# Altium PCB LP_LED_CUBE_8x8x8.PcbDoc
Units mil, origin at the board's own origin, x right, y up, seen from the top; angles counter-clockwise.
Board outline 4475 x 2925 mil, 2 copper layers (Top Layer, Bottom Layer); 153 components, 189 nets, 689 pads, 0 vias.
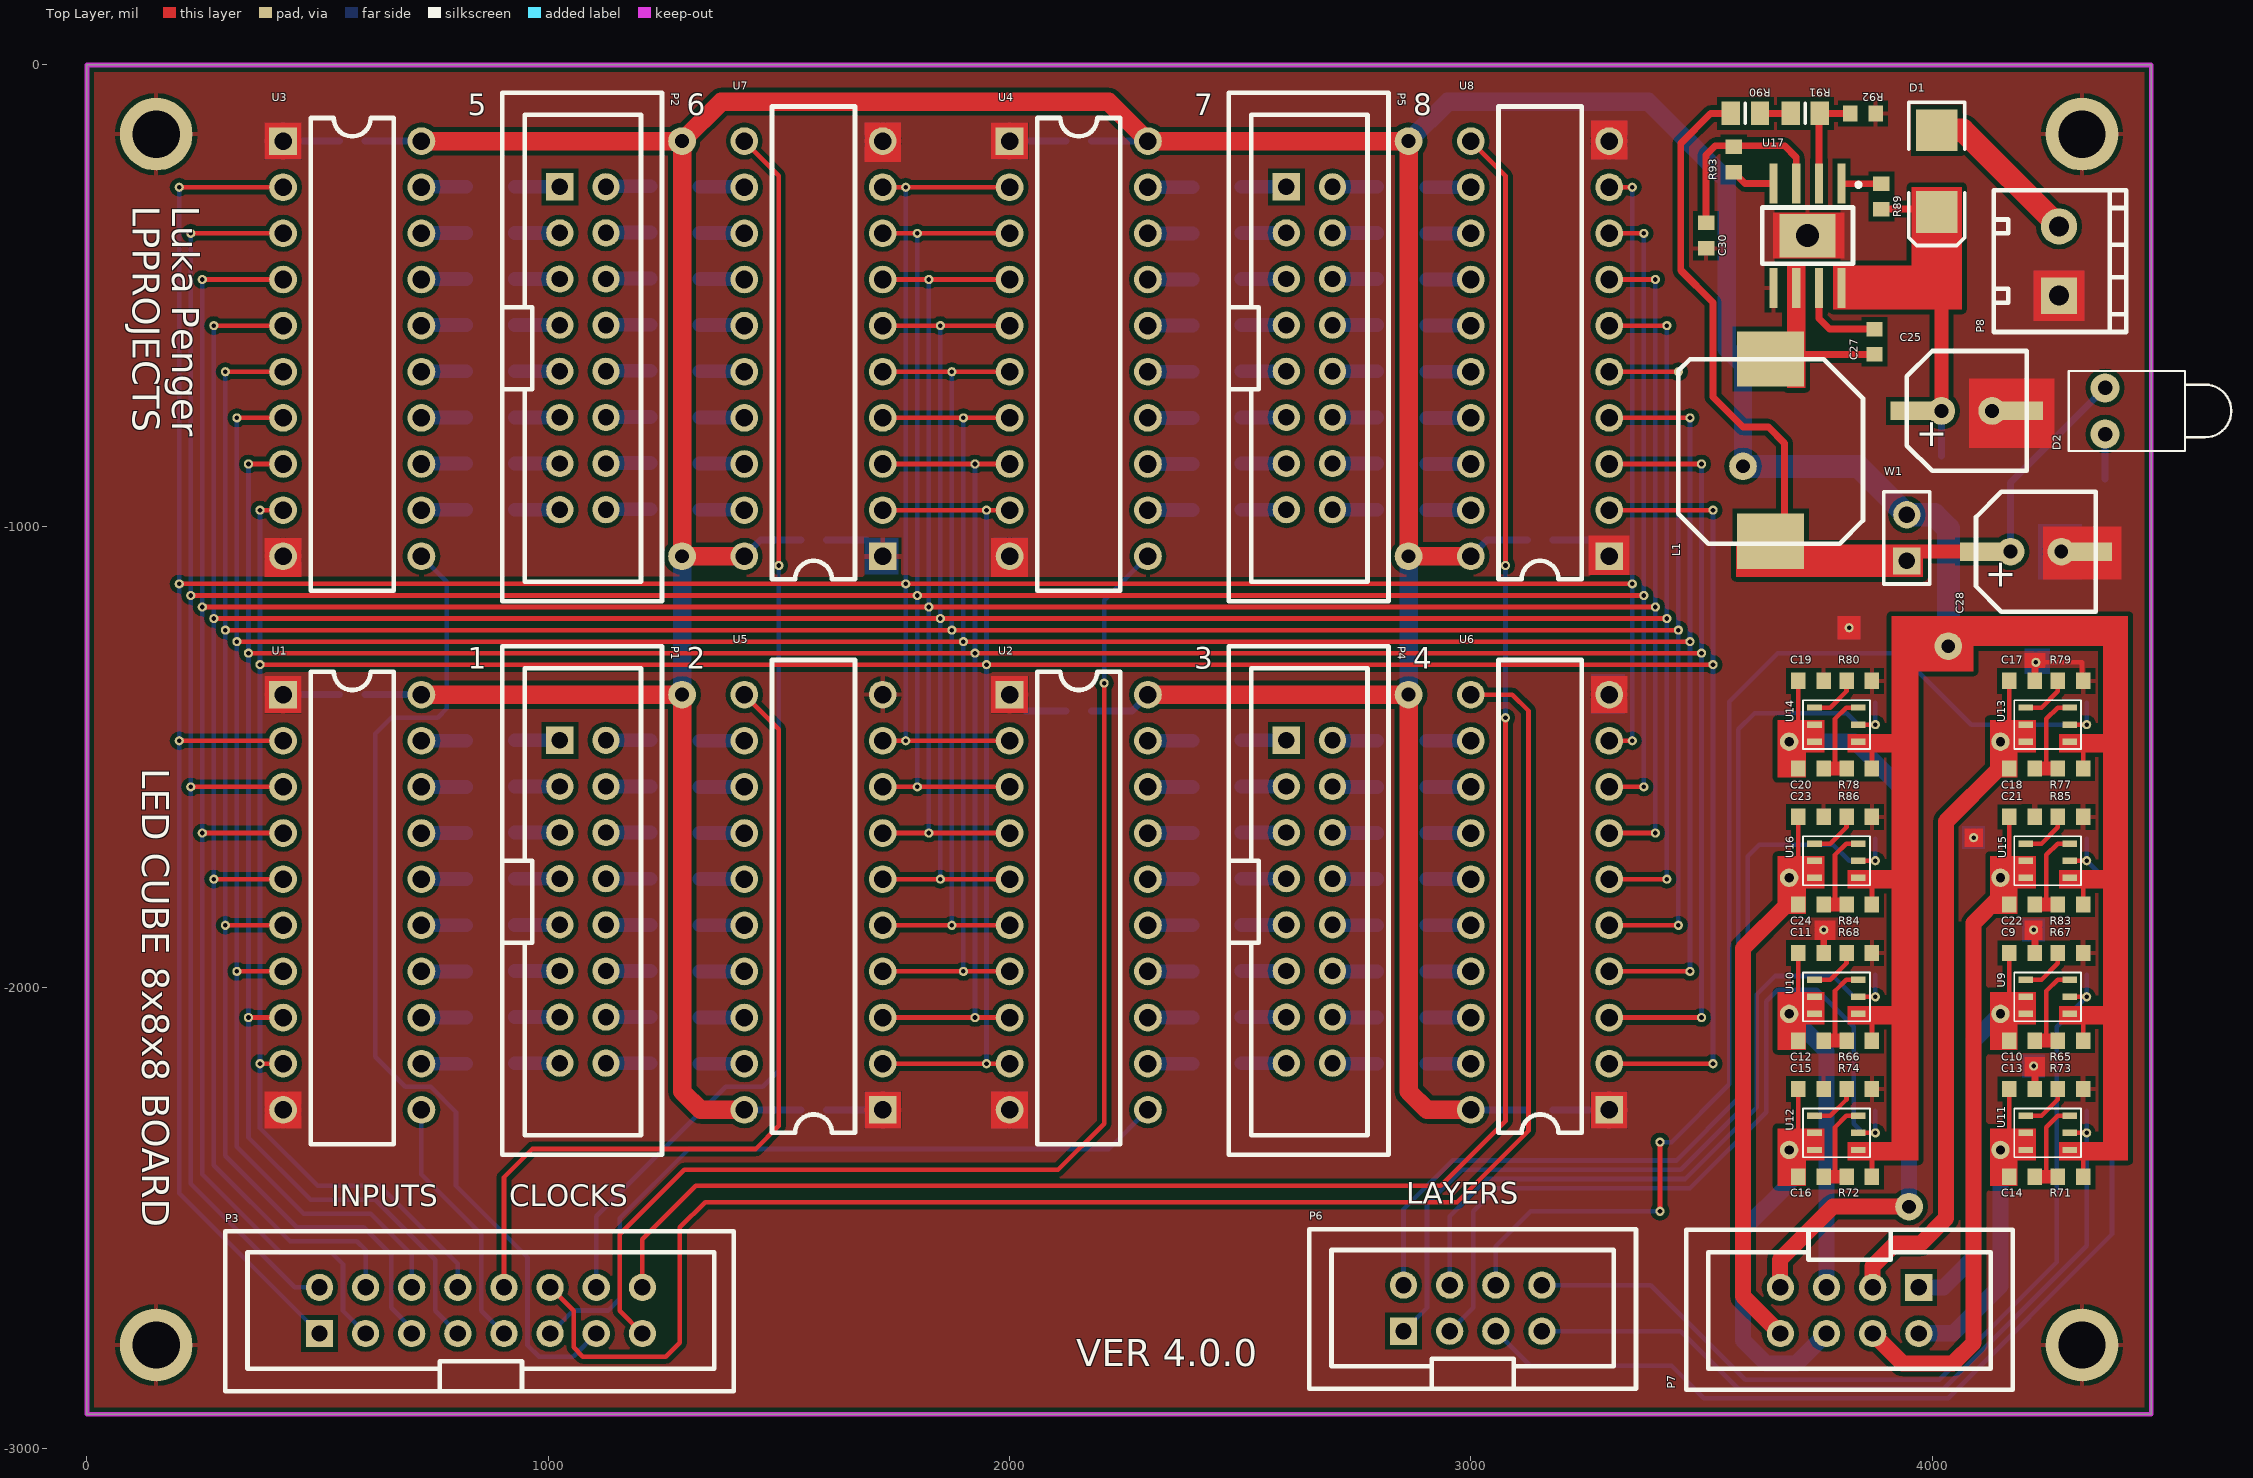
[diagram p0: Top Layer view]
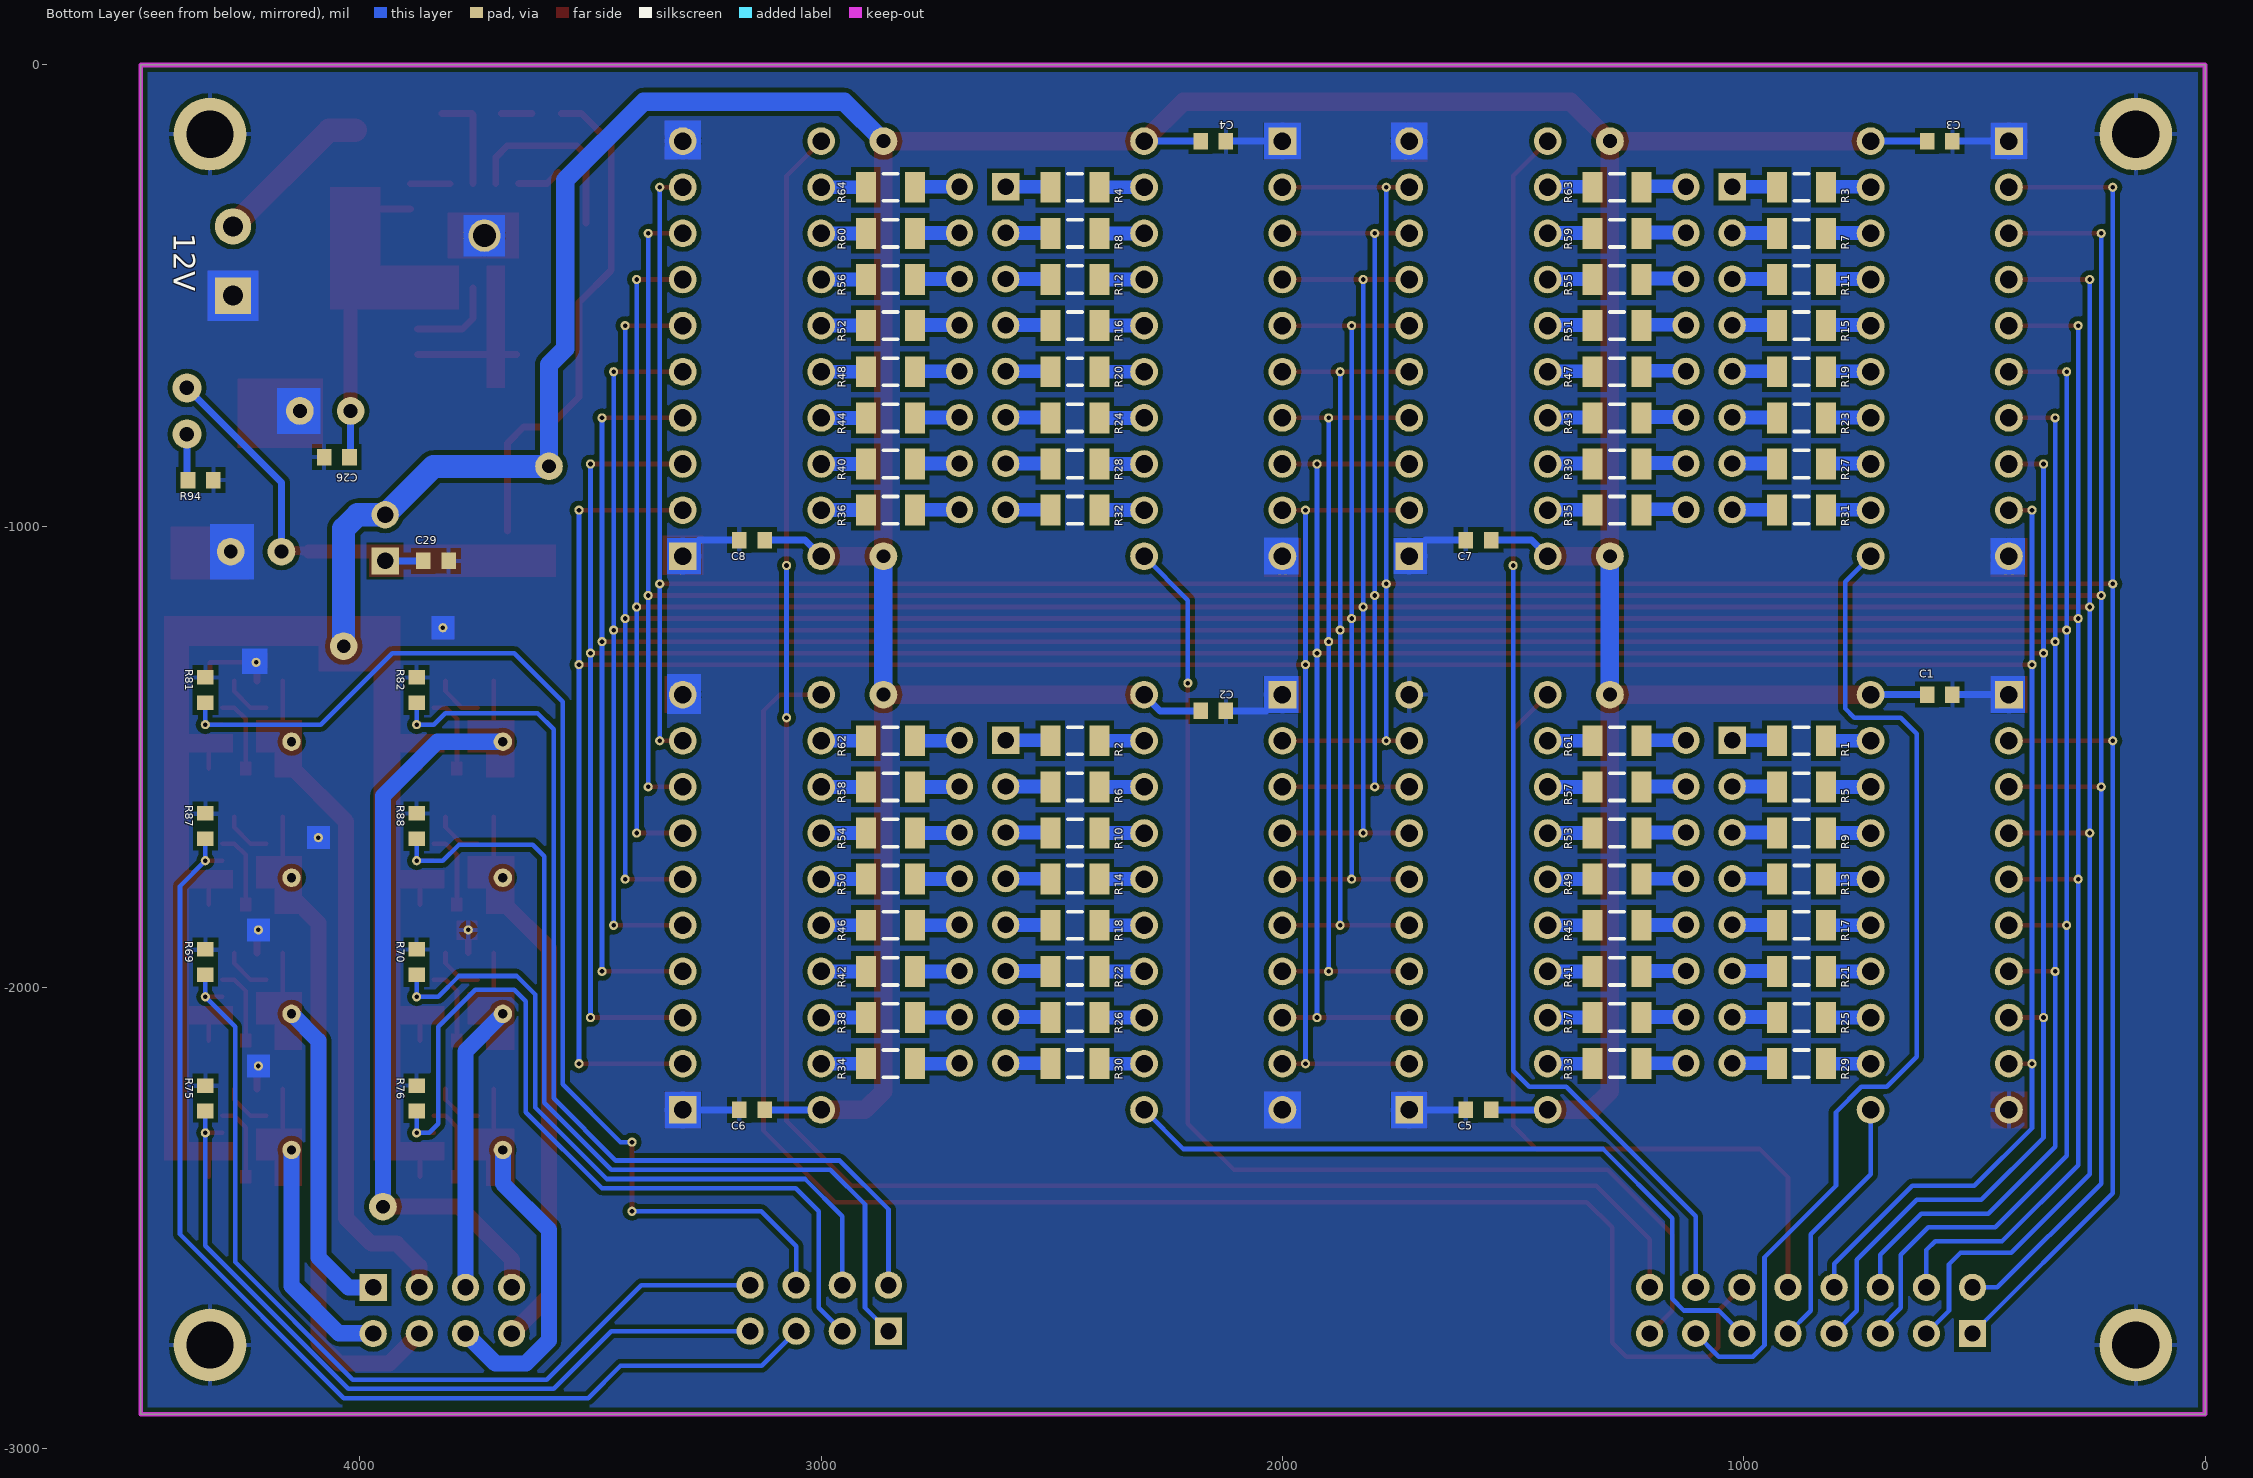
[diagram p1: Bottom Layer view, seen from below]

## Layer stack, top to bottom
Top Layer: signal copper 1.4
Dielectric: dielectric 12.6, FR-4, Dk 4.8
Bottom Layer: signal copper 1.4

## Board outline
0,-2925 4475,-2925 4475,0 0,0

## Design rules (kind name [scope] priority, off if disabled: settings)
Clearance [All] p1: gap=10
PolygonConnect [All] p1: connectstyle=Relief reliefconductorwidth=10 reliefentries=4 polygonreliefangle="90 Angle"
RoutingVias [All] p1: holewidth=28 width=50 viastyle="Through Hole" minholewidth=28 minwidth=50 maxholewidth=28 maxwidth=50
SilkscreenOverComponentPads [All] p1: minsilkscreentomaskgap=10
SolderMaskExpansion [All] p1: expansion=4
Width [All] p1: maxlimit=10 minlimit=10 preferedwidth=10
27 further rules are at their usual default settings.

## Classes and differential pairs
component class POWER: C25 C26 C27 C28 C29 C30 D1 D2 L1 P8 R89 R90 R91 R92 R93 R94 U17 W1
component class LED: C1 C2 C3 C4 C5 C6 C7 C8 P1 P2 P3 P4 P5 R1 R2 R3 R4 R5 R6 R7 R8 R9 R10 R11 R12 R13 R14 R15 R16 R17 R18 R19 R20 R21 R22 R23 R24 R25 R26 R27 R28 R29 R30 R31 R32 R33 R34 R35 R36 R37 R38 R39 R40 R41 R42 R43 R44 R45 R46 R47 R48 R49 R50 R51 R52 R53 R54 R55 R56 R57 R58 R59 R60 R61 R62 R63 R64 U1 U2 U3 U4 U5 U6 U7 U8
component class LED_ROWS: C9 C10 C11 C12 C13 C14 C15 C16 C17 C18 C19 C20 C21 C22 C23 C24 P6 P7 R65 R66 R67 R68 R69 R70 R71 R72 R73 R74 R75 R76 R77 R78 R79 R80 R81 R82 R83 R84 R85 R86 R87 R88 U9 U10 U11 U12 U13 U14 U15 U16

## Components (designator, comment, footprint, x,y, rotation, side; value= is the part's Value field where it differs from the comment)
C1 "100n" 1608[0603] 575,-1365 r0 bottom
C2 "100n" 1608[0603] 2150,-1400 r0 bottom
C3 "100n" 1608[0603] 575,-165 r0 bottom
C4 "100n" 1608[0603] 2150,-165 r0 bottom
C5 "100n" 1608[0603] 1575,-2265 r180 bottom
C6 "100n" 1608[0603] 3150,-2265 r180 bottom
C7 "100n" 1608[0603] 1575,-1030 r180 bottom
C8 "100n" 1608[0603] 3150,-1030 r180 bottom
C9 "100n" 1608[0603] 4195,-1925 r0 top
C10 "1n" 1608[0603] 4195,-2115 r0 top
C11 "100n" 1608[0603] 3737,-1925 r0 top
C12 "1n" 1608[0603] 3737,-2115 r0 top
C13 "100n" 1608[0603] 4195,-2220 r0 top
C14 "1n" 1608[0603] 4195,-2410 r0 top
C15 "100n" 1608[0603] 3737,-2220 r0 top
C16 "1n" 1608[0603] 3737,-2410 r0 top
C17 "100n" 1608[0603] 4195,-1335 r0 top
C18 "1n" 1608[0603] 4195,-1525 r0 top
C19 "100n" 1608[0603] 3737,-1335 r0 top
C20 "1n" 1608[0603] 3737,-1525 r0 top
C21 "100n" 1608[0603] 4195,-1630 r0 top
C22 "1n" 1608[0603] 4195,-1820 r0 top
C23 "100n" 1608[0603] 3737,-1630 r0 top
C24 "1n" 1608[0603] 3737,-1820 r0 top
C25 "220uF" "SMD CAPACITOR 220uF" 4075,-750 r90 top
C26 "100n" 1608[0603] 4050,-850 r0 bottom
C27 "0.47uF" 1608[0603] 3875,-600 r270 top
C28 "220uF" "SMD CAPACITOR 220uF" 4225,-1055 r90 top
C29 "100n" 1608[0603] 3835,-1075 r180 bottom
C30 "0.47uF" 1608[0603] 3510,-370 r270 top
D1 "Schottky" SMB 4010,-230 r270 top
D2 "POWER LED" LED-1 4375,-750 r0 top
L1 "1.5uH" Inductor 3650,-835 r270 top
P1 "Header 8X2" IDC-2x8 900,-1260 r270 top
P2 "Header 8X2" IDC-2x8 900,-60 r270 top
P3 "LED Connector" IDC-2x8 300,-2875 r0 top
P4 "Header 8X2" IDC-2x8 2475,-1260 r270 top
P5 "Header 8X2" IDC-2x8 2475,-60 r270 top
P6 "LED Layers Connector" IDC-2x4 2650,-2870 r0 top
P7 "LED Layers Output Connector" IDC-2x4 4175,-2525 r180 top
P8 "Power 3.3V" "Block2 - 3.81" 4275,-350 r90 top
R1 "100R" C1206 875,-1465 r0 bottom
R2 "100R" C1206 2450,-1465 r0 bottom
R3 "100R" C1206 875,-265 r0 bottom
R4 "100R" C1206 2450,-265 r0 bottom
R5 "100R" C1206 875,-1565 r0 bottom
R6 "100R" C1206 2450,-1565 r0 bottom
R7 "100R" C1206 875,-365 r0 bottom
R8 "100R" C1206 2450,-365 r0 bottom
R9 "100R" C1206 875,-1665 r0 bottom
R10 "100R" C1206 2450,-1665 r0 bottom
R11 "100R" C1206 875,-465 r0 bottom
R12 "100R" C1206 2450,-465 r0 bottom
R13 "100R" C1206 875,-1765 r0 bottom
R14 "100R" C1206 2450,-1765 r0 bottom
R15 "100R" C1206 875,-565 r0 bottom
R16 "100R" C1206 2450,-565 r0 bottom
R17 "100R" C1206 875,-1865 r0 bottom
R18 "100R" C1206 2450,-1865 r0 bottom
R19 "100R" C1206 875,-665 r0 bottom
R20 "100R" C1206 2450,-665 r0 bottom
R21 "100R" C1206 875,-1965 r0 bottom
R22 "100R" C1206 2450,-1965 r0 bottom
R23 "100R" C1206 875,-765 r0 bottom
R24 "100R" C1206 2450,-765 r0 bottom
R25 "100R" C1206 875,-2065 r0 bottom
R26 "100R" C1206 2450,-2065 r0 bottom
R27 "100R" C1206 875,-865 r0 bottom
R28 "100R" C1206 2450,-865 r0 bottom
R29 "100R" C1206 875,-2165 r0 bottom
R30 "100R" C1206 2450,-2165 r0 bottom
R31 "100R" C1206 875,-965 r0 bottom
R32 "100R" C1206 2450,-965 r0 bottom
R33 "100R" C1206 1275,-2165 r180 bottom
R34 "100R" C1206 2850,-2165 r180 bottom
R35 "100R" C1206 1275,-965 r180 bottom
R36 "100R" C1206 2850,-965 r180 bottom
R37 "100R" C1206 1275,-2065 r180 bottom
R38 "100R" C1206 2850,-2065 r180 bottom
R39 "100R" C1206 1275,-865 r180 bottom
R40 "100R" C1206 2850,-865 r180 bottom
R41 "100R" C1206 1275,-1965 r180 bottom
R42 "100R" C1206 2850,-1965 r180 bottom
R43 "100R" C1206 1275,-765 r180 bottom
R44 "100R" C1206 2850,-765 r180 bottom
R45 "100R" C1206 1275,-1865 r180 bottom
R46 "100R" C1206 2850,-1865 r180 bottom
R47 "100R" C1206 1275,-665 r180 bottom
R48 "100R" C1206 2850,-665 r180 bottom
R49 "100R" C1206 1275,-1765 r180 bottom
R50 "100R" C1206 2850,-1765 r180 bottom
R51 "100R" C1206 1275,-565 r180 bottom
R52 "100R" C1206 2850,-565 r180 bottom
R53 "100R" C1206 1275,-1665 r180 bottom
R54 "100R" C1206 2850,-1665 r180 bottom
R55 "100R" C1206 1275,-465 r180 bottom
R56 "100R" C1206 2850,-465 r180 bottom
R57 "100R" C1206 1275,-1565 r180 bottom
R58 "100R" C1206 2850,-1565 r180 bottom
R59 "100R" C1206 1275,-365 r180 bottom
R60 "100R" C1206 2850,-365 r180 bottom
R61 "100R" C1206 1275,-1465 r180 bottom
R62 "100R" C1206 2850,-1465 r180 bottom
R63 "100R" C1206 1275,-265 r180 bottom
R64 "100R" C1206 2850,-265 r180 bottom
R65 "10k" 1608[0603] 4300,-2115 r0 top
R66 "10k" 1608[0603] 3842,-2115 r0 top
R67 "0R" 1608[0603] 4300,-1925 r0 top
R68 "0R" 1608[0603] 3842,-1925 r0 top
R69 "10k" 1608[0603] 4335,-1945 r270 bottom
R70 "10k" 1608[0603] 3877,-1945 r270 bottom
R71 "10k" 1608[0603] 4300,-2410 r0 top
R72 "10k" 1608[0603] 3842,-2410 r0 top
R73 "0R" 1608[0603] 4300,-2220 r0 top
R74 "0R" 1608[0603] 3842,-2220 r0 top
R75 "10k" 1608[0603] 4335,-2240 r270 bottom
R76 "10k" 1608[0603] 3877,-2240 r270 bottom
R77 "10k" 1608[0603] 4300,-1525 r0 top
R78 "10k" 1608[0603] 3842,-1525 r0 top
R79 "0R" 1608[0603] 4300,-1335 r0 top
R80 "0R" 1608[0603] 3842,-1335 r0 top
R81 "10k" 1608[0603] 4335,-1355 r270 bottom
R82 "10k" 1608[0603] 3877,-1355 r270 bottom
R83 "10k" 1608[0603] 4300,-1820 r0 top
R84 "10k" 1608[0603] 3842,-1820 r0 top
R85 "0R" 1608[0603] 4300,-1630 r0 top
R86 "0R" 1608[0603] 3842,-1630 r0 top
R87 "10k" 1608[0603] 4335,-1650 r270 bottom
R88 "10k" 1608[0603] 3877,-1650 r270 bottom
R89 "10k" 1608[0603] 3890,-285 r270 top
R90 "0R" 6-0805_L 3595,-105 r180 top
R91 "226k" 6-0805_L 3725,-105 r180 top
R92 "49.9k" 1608[0603] 3850,-105 r180 top
R93 "100k" 1608[0603] 3570,-205 r90 top
R94 "470R" 1608[0603] 4345,-900 r0 bottom
U1 "74HCT574" DIP20 425,-1365 r0 top
U2 "74HCT574" DIP20 2000,-1365 r0 top
U3 "74HCT574" DIP20 425,-165 r0 top
U4 "74HCT574" DIP20 2000,-165 r0 top
U5 "74HCT574" DIP20 1725,-2265 r180 top
U6 "74HCT574" DIP20 3300,-2265 r180 top
U7 "74HCT574" DIP20 1725,-1065 r180 top
U8 "74HCT574" DIP20 3300,-1065 r180 top
U9 "SI3861BDV" "TSOP 6" 4250,-2020 r0 top
U10 "SI3861BDV" "TSOP 6" 3792,-2020 r0 top
U11 "SI3861BDV" "TSOP 6" 4250,-2315 r0 top
U12 "SI3861BDV" "TSOP 6" 3792,-2315 r0 top
U13 "SI3861BDV" "TSOP 6" 4250,-1430 r0 top
U14 "SI3861BDV" "TSOP 6" 3792,-1430 r0 top
U15 "SI3861BDV" "TSOP 6" 4250,-1725 r0 top
U16 "SI3861BDV" "TSOP 6" 3792,-1725 r0 top
U17 "TPS56528" TPS56528 3730,-370 r270 top
W1 "Jumper" HDR1X2 3945,-1075 r90 top

## Footprints (in the part's own frame and the unit in brackets; to place one, negate y for a bottom-side part, rotate by r counter-clockwise, add the part's x,y. Pads: shape width x height; smd on the part's side, far side on the other; paste and mask are expansions set on the pad)
6-0805_L [mm] "Chip Resistor, Body 2.0x1.2mm, IPC High Density"
  rect 1x1.3 smd: 1(-0.8,0) 2(0.8,0)
  silkscreen extent 0,-0.55 0,0.55, body extent -1.07,-0.7 1.07,0.7, height 0.7
1608[0603] [mm] "Chip Capacitor, Body 1.6x0.8mm, IPC High Density"
  rect 0.8x0.9 smd: 1(-0.7,0) 2(0.7,0)
  body extent -0.87,-0.48 0.87,0.48, height 1.3
"Block2 - 3.81" [mm] "3.81mm"
  rect 2x2 hole 1.1: 1(-3.81,0)
  round 2 hole 1.1: 2(0,0)
  silkscreen extent -5.81,-3.7 2,3.6
C1206 [mm] "Chip Capacitor, Body 3.2x1.6mm, IPC High Density"
  rect 1.1x1.7 smd: 1(-1.35,0) 2(1.35,0)
  silkscreen extent -0.4,-0.75 0.4,0.75, body extent -1.7,-0.9 1.7,0.9, height 1.3
DIP20 [mil]
  rect 60x60 hole 38 mask-1000: 1(0,0)
  round 60 hole 38 mask-1000: 2(0,-100) 3(0,-200) 4(0,-300) 5(0,-400) 6(0,-500) 7(0,-600) 8(0,-700) 9(0,-800) 10(0,-900) 11(300,-900) 12(300,-800) 13(300,-700) 14(300,-600) 15(300,-500) 16(300,-400) 17(300,-300) 18(300,-200) 19(300,-100) 20(300,0)
  silkscreen extent 60,-975 240,50
HDR1X2 [mm] "Connector; Header; 2 Position"
  rect 1.5x1.5 hole 0.9: 1(0,0)
  round 1.5 hole 0.9: 2(2.54,0)
  silkscreen extent -1.27,-1.27 3.81,1.27
IDC-2x4 [mm] "IDC Male Connector"
  rect 1.5x1.5 hole 0.9: 1(5.182,3.175)
  round 1.5 hole 0.9: 2(5.182,5.715) 3(7.722,3.175) 4(7.722,5.715) 5(10.262,3.175) 6(10.262,5.715) 7(12.802,3.175) 8(12.802,5.715)
  silkscreen extent 0,0 17.98,8.8
IDC-2x8 [mm] "IDC Male Connector"
  rect 1.5x1.5 hole 0.9: 1(5.182,3.175)
  round 1.5 hole 0.9: 2(5.182,5.715) 3(7.722,3.175) 4(7.722,5.715) 5(10.262,3.175) 6(10.262,5.715) 7(12.802,3.175) 8(12.802,5.715) 9(15.342,3.175) 10(15.342,5.715) 11(17.882,3.175) 12(17.882,5.715) 13(20.422,3.175) 14(20.422,5.715) 15(22.962,3.175) 16(22.962,5.715)
  silkscreen extent 0,0 28,8.8
Inductor [mil]
  rect 120x145 smd: 1(-197.5,0) 2(197.5,0)
  silkscreen extent -198,-200 203,200
LED-1 [mm] "LED; 2 Leads"
  round 1.6 hole 0.8: 1(0,1.27) 2(0,-1.27)
  silkscreen extent -2,-2.2 6.95,2.2
SMB [mm] "DO-214-AA/SMB; 2 C-Bend Leads; Body 5.3 x 3.6 mm, inc. leads (LxW)"
  rect 2.3x2.3 smd: 1(-2.25,0) 2(2.25,0)
  silkscreen extent -3.8,-1.55 4.1,1.55
"SMD CAPACITOR 220uF" [mil]
  rect 40x100 smd: 1(0,115) 2(0,-115)
  round 60 hole 30: 1(0,55) 2(0,-55)
  silkscreen extent -130,-130 130,130
TPS56528 [mm] "Step-Down Converter SO PowerPAD"
  rect 2.2x0.45 smd: 1(-2.875,1.875) 2(-2.875,0.625) 3(-2.875,-0.625) 4(-2.875,-1.875) 5(2.875,-1.875) 6(2.875,-0.625) 7(2.875,0.625) 8(2.875,1.875)
  rect 2.4x3.1 smd: 5(0,0)
  silkscreen extent -2.9,-2.5 1.55,2.9
"TSOP 6" [mm]
  rect 0.8x0.35 smd: 1(-1.194,0.94) 2(-1.194,0) 3(-1.194,-0.94) 4(1.219,-0.94) 5(1.219,0) 6(1.219,0.94)
  silkscreen extent -1.83,-1.35 1.85,1.35

## Part data
C1 C2 C3 C4 C5 C6 C7 C8 C9 C10 C11 C12 C13 C14 C15 C16 C17 C18 C19 C20 C21 C22 C23 C24 C26 C27 C29 C30: library part Cap, "Capacitor"
C25 C28: library part "Cap Pol1", "Capacitor"
D1: library part "D Schottky", "Schottky Diode"
D2: library part LED0, "Typical INFRARED GaAs LED"
L1: library part "Inductor Iron", "Magnetic-Core Inductor"
P1 P2 P4 P5: "Header, 8-Pin, Dual row"
P3: library part "Header 8X2", "Header, 8-Pin, Dual row"
P6 P7: library part "Header 4X2", "Header, 4-Pin, Dual row"
P8: library part "Header 2", "Header, 2-Pin"
R1 R2 R3 R4 R5 R6 R7 R8 R9 R10 R11 R12 R13 R14 R15 R16 R17 R18 R19 R20 R21 R22 R23 R24 R25 R26 R27 R28 R29 R30 R31 R32 R33 R34 R35 R36 R37 R38 R39 R40 R41 R42 R43 R44 R45 R46 R47 R48 R49 R50 R51 R52 R53 R54 R55 R56 R57 R58 R59 R60 R61 R62 R63 R64 R65 R66 R67 R68 R69 R70 R71 R72 R73 R74 R75 R76 R77 R78 R79 R80 R81 R82 R83 R84 R85 R86 R87 R88 R89 R90 R91 R92 R93 R94: library part Res2, "Resistor"
U1 U2 U3 U4 U5 U6 U7 U8: "D Flip Flops"
U9 U10 U11 U12 U13 U14 U15 U16: "4.5 - 20V 2.3A Load Switch"
U17: "Step-Down Converter 5A 4.5V-18V"
W1: "Jumper Wire"

## Free pads (board coordinates)
  round 20 hole 10: 1(200,-1465) 1(200,-265) 1(225,-1565) 1(225,-365) 1(250,-1665) 1(250,-465) 1(275,-1765) 1(275,-565) 1(300,-1865) 1(300,-665) 1(325,-1965) 1(325,-765) 1(350,-2065) 1(350,-865) 1(375,-2165) 1(375,-965) 1(1775,-1465) 1(1775,-265) 1(1800,-1565) 1(1800,-365) 1(1825,-1665) 1(1825,-465) 1(1850,-1765) 1(1850,-565) 1(1875,-1865) 1(1875,-665) 1(1900,-1965) 1(1900,-765) 1(1925,-2065) 1(1925,-865) 1(1950,-2165) 1(1950,-965) 1(3350,-1465) 1(3350,-265) 1(3375,-1565) 1(3375,-365) 1(3400,-1665) 1(3400,-465) 1(3425,-1765) 1(3425,-565) 1(3450,-1865) 1(3450,-665) 1(3475,-1965) 1(3475,-765) 1(3500,-2065) 1(3500,-865) 1(3525,-2165) 1(3525,-965) 2(200,-1125) 2(225,-1150) 2(250,-1175) 2(275,-1200) 2(300,-1225) 2(325,-1250) 2(350,-1275) 2(375,-1300) 2(1775,-1125) 2(1800,-1150) 2(1825,-1175) 2(1850,-1200) 2(1875,-1225) 2(1900,-1250) 2(1925,-1275) 2(1950,-1300) 2(3350,-1125) 2(3375,-1150) 2(3400,-1175) 2(3425,-1200) 2(3450,-1225) 2(3475,-1250) 2(3500,-1275) 2(3525,-1300) 7(2205,-1340) 9(3075,-1085) 10(3075,-1415) 11(1500,-1085) 13(3765,-1875) 13(3820,-1220) 13(3877,-2315) 13(3877,-2020) 13(3877,-1725) 13(3877,-1430) 13(4090,-1675) 13(4220,-2170) 13(4220,-1875) 13(4225,-1295) 13(4335,-2315) 13(4335,-2020) 13(4335,-1725) 13(4335,-1430) 17(3410,-2485) 17(3410,-2335)
  round 60 hole 30: 3(2865,-1065) 4(2865,-1365) 5(1290,-1065) 6(1290,-1365) 12(2865,-165) 13(1290,-165) 14(3590,-870) 15(4035,-1260) 16(3950,-2475)
  round 40 hole 20: 4(3690,-2352) 4(3690,-2057) 4(3690,-1762) 4(3690,-1467) 4(4148,-2352) 4(4148,-2057) 4(4148,-1762) 4(4148,-1467)
  round 70 hole 50: 16(3730,-370)
  round 157.48 hole 102.36: ""(150,-2775) ""(150,-150) ""(4325,-2775) ""(4325,-150)

## Nets (pads, with @x,y where several pads share a name; then routed paths per layer and width w, separated by ;. In a path a pad name is that pad's centre, name@x,y a point inside that pad or via, vN(x,y) a via of type N, cw(c..) or ccw(c..) an arc to the next point about the centre after c; other vN are vias at no path point)
CLK1: P3.9 U1.11 | length 559.1
  Bottom Layer w10: U1.11 725,-2405 855,-2535 855,-2701 P3.9
CLK2: P3.10 U5.11 | length 1847
  Top Layer w10: P3.10 904,-2411 965,-2350 1450,-2350 1500,-2300 1500,-1440 U5.11
CLK3: P3.11 U2.11 | length 1599.4
  Bottom Layer w10: P3.11 1054,-2700 1130,-2700 1155,-2675 1155,-2500 1305,-2350 2215,-2350 U2.11
CLK4: P3.12 U6.11 | length 3628.3
  Top Layer w10: P3.12 1055,-2701 1055,-2780 1075,-2800 1255,-2800 1285,-2770 1285,-2520 1340,-2465 2970,-2465 3125,-2310 3125,-1400 3090,-1365 U6.11
CLK5: P3.13 U3.11 | length 2204.5
  Bottom Layer w10: U3.11 780,-1120 780,-1395 760,-1415 660,-1415 625,-1450 625,-2150 690,-2215 745,-2215 800,-2270 800,-2430 955,-2585 955,-2775 980,-2800 1054,-2800 P3.13
CLK6: P3.14 pad.11 U7.11 | length 2727
  Top Layer w10: U7.11 1500,-240 pad.11
  Bottom Layer w10: P3.14 1104,-2496 1385,-2215 1465,-2215 1500,-2180 pad.11
CLK7: P3.15 pad.7 U4.11 | length 2654.1
  Top Layer w10: P3.15 1155,-2701 1155,-2535 1295,-2395 2105,-2395 2205,-2295 pad.7
  Bottom Layer w10: pad.7 2205,-1160 U4.11
CLK8: P3.16 pad.9 pad.10 U8.11 | length 4237.1
  Top Layer w10: P3.16 1204,-2546 1320,-2430 2935,-2430 3075,-2290 pad.10 ; U8.11 3075,-240 pad.9
  Bottom Layer w10: pad.10 pad.9
CO1_1: P1.1 R1.2 | length 96.8
  Bottom Layer w30: R1.2@928.15,-1464 P1.1
CO1_2: P1.3 R5.2 | length 96.8
  Bottom Layer w30: R5.2@928.15,-1564 P1.3
CO1_3: P1.5 R9.2 | length 96.8
  Bottom Layer w30: R9.2@928.15,-1664 P1.5
CO1_4: P1.7 R13.2 | length 96.8
  Bottom Layer w30: R13.2@928.15,-1764 P1.7
CO1_5: P1.9 R17.2 | length 96.8
  Bottom Layer w30: R17.2@928.15,-1864 P1.9
CO1_6: P1.11 R21.2 | length 96.8
  Bottom Layer w30: R21.2@928.15,-1964 P1.11
CO1_7: P1.13 R25.2 | length 96.8
  Bottom Layer w30: R25.2@928.15,-2064 P1.13
CO1_8: P1.15 R29.2 | length 96.8
  Bottom Layer w30: R29.2@928.15,-2164 P1.15
CO2_1: P1.2 R61.2 | length 96.8
  Bottom Layer w30: P1.2 R61.2@1221.85,-1464
CO2_2: P1.4 R57.2 | length 96.8
  Bottom Layer w30: P1.4 R57.2@1221.85,-1564
CO2_3: P1.6 R53.2 | length 96.8
  Bottom Layer w30: P1.6 R53.2@1221.85,-1664
CO2_4: P1.8 R49.2 | length 96.8
  Bottom Layer w30: P1.8 R49.2@1221.85,-1764
CO2_5: P1.10 R45.2 | length 96.8
  Bottom Layer w30: P1.10 R45.2@1221.85,-1864
CO2_6: P1.12 R41.2 | length 96.8
  Bottom Layer w30: P1.12 R41.2@1221.85,-1964
CO2_7: P1.14 R37.2 | length 96.8
  Bottom Layer w30: P1.14 R37.2@1221.85,-2064
CO2_8: P1.16 R33.2 | length 96.8
  Bottom Layer w30: P1.16 R33.2@1221.85,-2164
CO3_1: P4.1 R2.2 | length 96.8
  Bottom Layer w30: R2.2@2503.15,-1464 P4.1
CO3_2: P4.3 R6.2 | length 96.8
  Bottom Layer w30: R6.2@2503.15,-1564 P4.3
CO3_3: P4.5 R10.2 | length 96.8
  Bottom Layer w30: R10.2@2503.15,-1664 P4.5
CO3_4: P4.7 R14.2 | length 96.8
  Bottom Layer w30: R14.2@2503.15,-1764 P4.7
CO3_5: P4.9 R18.2 | length 96.8
  Bottom Layer w30: R18.2@2503.15,-1864 P4.9
CO3_6: P4.11 R22.2 | length 96.8
  Bottom Layer w30: R22.2@2503.15,-1964 P4.11
CO3_7: P4.13 R26.2 | length 96.8
  Bottom Layer w30: R26.2@2503.15,-2064 P4.13
CO3_8: P4.15 R30.2 | length 96.8
  Bottom Layer w30: R30.2@2503.15,-2164 P4.15
CO4_1: P4.2 R62.2 | length 96.8
  Bottom Layer w30: P4.2@2700,-1465 R62.2
CO4_2: P4.4 R58.2 | length 96.8
  Bottom Layer w30: P4.4@2700,-1565 R58.2
CO4_3: P4.6 R54.2 | length 96.8
  Bottom Layer w30: P4.6@2700,-1665 R54.2
CO4_4: P4.8 R50.2 | length 96.8
  Bottom Layer w30: P4.8@2700,-1765 R50.2
CO4_5: P4.10 R46.2 | length 96.8
  Bottom Layer w30: P4.10@2700,-1865 R46.2
CO4_6: P4.12 R42.2 | length 96.8
  Bottom Layer w30: P4.12@2700,-1965 R42.2
CO4_7: P4.14 R38.2 | length 96.8
  Bottom Layer w30: P4.14@2700,-2065 R38.2
CO4_8: P4.16 R34.2 | length 96.8
  Bottom Layer w30: P4.16@2700,-2165 R34.2
CO5_1: P2.1 R3.2 | length 96.8
  Bottom Layer w30: R3.2@928.15,-264 P2.1
CO5_2: P2.3 R7.2 | length 96.8
  Bottom Layer w30: R7.2@928.15,-364 P2.3
CO5_3: P2.5 R11.2 | length 96.8
  Bottom Layer w30: R11.2@928.15,-464 P2.5
CO5_4: P2.7 R15.2 | length 96.8
  Bottom Layer w30: R15.2@928.15,-564 P2.7
CO5_5: P2.9 R19.2 | length 96.8
  Bottom Layer w30: R19.2@928.15,-664 P2.9
CO5_6: P2.11 R23.2 | length 96.8
  Bottom Layer w30: R23.2@928.15,-764 P2.11
CO5_7: P2.13 R27.2 | length 96.8
  Bottom Layer w30: R27.2@928.15,-864 P2.13
CO5_8: P2.15 R31.2 | length 96.8
  Bottom Layer w30: R31.2@928.15,-964 P2.15
CO6_1: P2.2 R63.2 | length 96.8
  Bottom Layer w30: P2.2@1125,-263 R63.2@1221.85,-263
CO6_2: P2.4 R59.2 | length 96.8
  Bottom Layer w30: P2.4@1125,-363 R59.2@1221.85,-363
CO6_3: P2.6 R55.2 | length 96.8
  Bottom Layer w30: P2.6@1125,-463 R55.2@1221.85,-463
CO6_4: P2.8 R51.2 | length 96.8
  Bottom Layer w30: P2.8@1125,-563 R51.2@1221.85,-563
CO6_5: P2.10 R47.2 | length 96.8
  Bottom Layer w30: P2.10@1125,-663 R47.2@1221.85,-663
CO6_6: P2.12 R43.2 | length 96.8
  Bottom Layer w30: P2.12@1125,-763 R43.2@1221.85,-763
CO6_7: P2.14 R39.2 | length 96.8
  Bottom Layer w30: P2.14@1125,-863 R39.2@1221.85,-863
CO6_8: P2.16 R35.2 | length 96.8
  Bottom Layer w30: P2.16@1125,-963 R35.2@1221.85,-963
CO7_1: P5.1 R4.2 | length 96.8
  Bottom Layer w30: R4.2@2503.15,-264 P5.1
CO7_2: P5.3 R8.2 | length 96.8
  Bottom Layer w30: R8.2@2503.15,-364 P5.3
CO7_3: P5.5 R12.2 | length 96.8
  Bottom Layer w30: R12.2@2503.15,-464 P5.5
CO7_4: P5.7 R16.2 | length 96.8
  Bottom Layer w30: R16.2@2503.15,-564 P5.7
CO7_5: P5.9 R20.2 | length 96.8
  Bottom Layer w30: R20.2@2503.15,-664 P5.9
CO7_6: P5.11 R24.2 | length 96.8
  Bottom Layer w30: R24.2@2503.15,-764 P5.11
CO7_7: P5.13 R28.2 | length 96.8
  Bottom Layer w30: R28.2@2503.15,-864 P5.13
CO7_8: P5.15 R32.2 | length 96.8
  Bottom Layer w30: R32.2@2503.15,-964 P5.15
CO8_1: P5.2 R64.2 | length 96.8
  Bottom Layer w30: P5.2 R64.2@2796.85,-264
CO8_2: P5.4 R60.2 | length 96.8
  Bottom Layer w30: P5.4 R60.2@2796.85,-364
CO8_3: P5.6 R56.2 | length 96.8
  Bottom Layer w30: P5.6 R56.2@2796.85,-464
CO8_4: P5.8 R52.2 | length 96.8
  Bottom Layer w30: P5.8 R52.2@2796.85,-564
CO8_5: P5.10 R48.2 | length 96.8
  Bottom Layer w30: P5.10 R48.2@2796.85,-664
CO8_6: P5.12 R44.2 | length 96.8
  Bottom Layer w30: P5.12 R44.2@2796.85,-764
CO8_7: P5.14 R40.2 | length 96.8
  Bottom Layer w30: P5.14 R40.2@2796.85,-864
CO8_8: P5.16 R36.2 | length 96.8
  Bottom Layer w30: P5.16 R36.2@2796.85,-964
COL1: P3.1 pad.1@200,-265 pad.1@200,-1465 pad.1@1775,-265 pad.1@1775,-1465 pad.1@3350,-265 pad.1@3350,-1465 pad.2@200,-1125 pad.2@1775,-1125 pad.2@3350,-1125 U1.2 U2.2 U3.2 U4.2 U5.9 U6.9 U7.9 U8.9 | length 9260.9
  Top Layer w10: pad.1@200,-1465 U1.2 ; pad.2@200,-1125 1775,-1125 pad.2@3350,-1125 ; pad.1@200,-265 U3.2 ; U5.9 1775,-1465 U2.2 ; U7.9 1775,-265 U4.2 ; U6.9 pad.1@3350,-1465 ; U8.9 pad.1@3350,-265
  Bottom Layer w10: pad.1@200,-265 200,-1125 200,-1465 200,-2446 P3.1 ; pad.1@1775,-1465 1775,-1125 pad.1@1775,-265 ; pad.1@3350,-1465 3350,-1125 pad.1@3350,-265
COL2: P3.2 pad.1@225,-365 pad.1@225,-1565 pad.1@1800,-365 pad.1@1800,-1565 pad.1@3375,-365 pad.1@3375,-1565 pad.2@225,-1150 pad.2@1800,-1150 pad.2@3375,-1150 U1.3 U2.3 U3.3 U4.3 U5.8 U6.8 U7.8 U8.8 | length 9082.2
  Top Layer w10: pad.1@225,-1565 U1.3 ; pad.2@225,-1150 1800,-1150 pad.2@3375,-1150 ; pad.1@225,-365 U3.3 ; U5.8 1800,-1565 U2.3 ; U7.8 1800,-365 U4.3 ; U6.8 pad.1@3375,-1565 ; U8.8 pad.1@3375,-365
  Bottom Layer w10: pad.1@225,-365 225,-1150 225,-1565 225,-2425 450,-2650 P3.2 ; pad.1@1800,-1565 1800,-1150 pad.1@1800,-365 ; pad.1@3375,-1565 3375,-1150 pad.1@3375,-365
COL3: P3.3 pad.1@250,-465 pad.1@250,-1665 pad.1@1825,-465 pad.1@1825,-1665 pad.1@3400,-465 pad.1@3400,-1665 pad.2@250,-1175 pad.2@1825,-1175 pad.2@3400,-1175 U1.4 U2.4 U3.4 U4.4 U5.7 U6.7 U7.7 U8.7 | length 10836.1
  Top Layer w10: pad.1@250,-1665 U1.4 ; pad.2@250,-1175 1825,-1175 pad.2@3400,-1175 ; pad.1@250,-465 U3.4 ; U5.7 1825,-1665 U2.4 ; U7.7 1825,-465 U4.4 ; U6.7 pad.1@3400,-1665 ; U8.7 pad.1@3400,-465
  Bottom Layer w10: pad.1@250,-465 250,-1175 250,-1665 250,-2405 420,-2575 530,-2575 555,-2600 555,-2701 P3.3 ; pad.2@3400,-1175 3400,-1665 pad.1@3400,-465 ; pad.1@1825,-1665 1825,-1175 1825,-465 pad.1@1825,-1665
COL4: P3.4 pad.1@275,-565 pad.1@275,-1765 pad.1@1850,-565 pad.1@1850,-1765 pad.1@3425,-565 pad.1@3425,-1765 pad.2@275,-1200 pad.2@1850,-1200 pad.2@3425,-1200 U1.5 U2.5 U3.5 U4.5 U5.6 U6.6 U7.6 U8.6 | length 10721.2
  Top Layer w10: pad.1@275,-1765 U1.5 ; pad.2@275,-1200 1850,-1200 pad.2@3425,-1200 ; pad.1@275,-565 U3.5 ; U5.6 1850,-1765 U2.5 ; U7.6 1850,-565 U4.5 ; U6.6 pad.1@3425,-1765 ; U8.6 pad.1@3425,-565
  Bottom Layer w10: pad.1@275,-565 275,-1200 275,-1765 275,-2385 440,-2550 585,-2550 604,-2569 P3.4 ; pad.2@3425,-1200 3425,-1765 pad.1@3425,-565 ; pad.1@1850,-1765 1850,-1200 1850,-565 pad.1@1850,-1765
COL5: P3.5 pad.1@300,-665 pad.1@300,-1865 pad.1@1875,-665 pad.1@1875,-1865 pad.1@3450,-665 pad.1@3450,-1865 pad.2@300,-1225 pad.2@1875,-1225 pad.2@3450,-1225 U1.6 U2.6 U3.6 U4.6 U5.5 U6.5 U7.5 U8.5 | length 10827.3
  Top Layer w10: pad.1@300,-1865 U1.6 ; pad.2@300,-1225 1875,-1225 pad.2@3450,-1225 ; pad.1@300,-665 U3.6 ; U5.5 1875,-1865 U2.6 ; U7.5 1875,-665 U4.6 ; U6.5 pad.1@3450,-1865 ; U8.5 pad.1@3450,-665
  Bottom Layer w10: pad.1@300,-665 300,-1225 300,-1865 300,-2365 455,-2520 600,-2520 659.47,-2579.47 659.47,-2694.53 704,-2739.06 P3.5 ; pad.2@1875,-1225 1875,-1865 pad.1@1875,-665 ; pad.1@3450,-1865 3450,-1225 3450,-665 pad.1@3450,-1865
COL6: P3.6 pad.1@325,-765 pad.1@325,-1965 pad.1@1900,-765 pad.1@1900,-1965 pad.1@3475,-765 pad.1@3475,-1965 pad.2@325,-1250 pad.2@1900,-1250 pad.2@3475,-1250 U1.7 U2.7 U3.7 U4.7 U5.4 U6.4 U7.4 U8.4 | length 10691.9
  Top Layer w10: pad.1@325,-1965 U1.7 ; pad.2@325,-1250 1900,-1250 pad.2@3475,-1250 ; pad.1@325,-765 U3.7 ; U5.4 1900,-1965 U2.7 ; U7.4 1900,-765 U4.7 ; U6.4 pad.1@3475,-1965 ; U8.4 pad.1@3475,-765
  Bottom Layer w10: pad.1@325,-765 325,-1250 325,-1965 325,-2345 470,-2490 615,-2490 704,-2579 P3.6 ; pad.2@3475,-1250 3475,-1965 pad.1@3475,-765 ; pad.1@1900,-1965 1900,-1250 1900,-765 pad.1@1900,-1965
COL7: P3.7 pad.1@350,-865 pad.1@350,-2065 pad.1@1925,-865 pad.1@1925,-2065 pad.1@3500,-865 pad.1@3500,-2065 pad.2@350,-1275 pad.2@1925,-1275 pad.2@3500,-1275 U1.8 U2.8 U3.8 U4.8 U5.3 U6.3 U7.3 U8.3 | length 9595.1
  Top Layer w10: pad.1@350,-2065 U1.8 ; pad.2@350,-1275 1925,-1275 pad.2@3500,-1275 ; pad.1@350,-865 U3.8 ; U5.3 1925,-2065 U2.8 ; U7.3 1925,-865 U4.8 ; U6.3 pad.1@3500,-2065 ; U8.3 pad.1@3500,-865
  Bottom Layer w10: pad.1@350,-865 350,-1275 350,-2065 350,-2325 485,-2460 625,-2460 755,-2590 755,-2701 P3.7 ; pad.1@1925,-2065 pad.1@1925,-865 ; pad.2@3500,-1275 3500,-2065 pad.1@3500,-865
COL8: P3.8 pad.1@375,-965 pad.1@375,-2165 pad.1@1950,-965 pad.1@1950,-2165 pad.1@3525,-965 pad.1@3525,-2165 pad.2@375,-1300 pad.2@1950,-1300 pad.2@3525,-1300 U1.9 U2.9 U3.9 U4.9 U5.2 U6.2 U7.2 U8.2 | length 8926.8
  Top Layer w10: pad.1@375,-2165 U1.9 ; pad.2@375,-1300 1950,-1300 pad.2@3525,-1300 ; pad.1@375,-965 U3.9 ; U5.2 1950,-2165 U2.9 ; U7.2 1950,-965 U4.9 ; U6.2 pad.1@3525,-2165 ; U8.2 pad.1@3525,-965
  Bottom Layer w10: pad.1@375,-965 375,-1300 375,-2165 375,-2305 500,-2430 635,-2430 804,-2599 P3.8 ; pad.1@1950,-2165 pad.1@1950,-965 ; pad.1@3525,-2165 3525,-965 pad.2@3525,-1300
GND: C1.1 C2.1 C3.1 C4.1 C5.1 C6.1 C7.1 C8.1 C9.2 C11.2 C13.2 C15.2 C17.2 C19.2 C21.2 C23.2 C25.2 C26.2 C28.2 C29.2 C30.2 P8.1 pad. pad.13@3765,-1875 pad.13@3820,-1220 pad.13@4090,-1675 pad.13@4220,-1875 pad.13@4220,-2170 pad.13@4225,-1295 pad.16@3730,-370 R67.2 R68.2 R69.1 R70.1 R73.2 R74.2 R75.1 R76.1 R79.2 R80.2 R81.1 R82.1 R85.2 R86.2 R87.1 R88.1 R92.1 R94.1 U1.1 U1.10 U2.1 U2.10 U3.1 U3.10 U4.1 U4.10 U5.1 U5.10 U6.1 U6.10 U7.1 U7.10 U8.1 U8.10 U17.5 | length 1346.1
  Top Layer w10: pad.13@4225,-1295 4325,-1295 4325,-1332.44 R79.2
  Top Layer w15: C11.2@3765,-1924.56 pad.13@3765,-1875 ; C13.2 pad.13@4222.56,-2172.56 ; C9.2 pad.13@4222.56,-1877.56 ; C17.2 pad.13@4222.56,-1297.44
  Bottom Layer w15: U1.1 C1.1 ; U3.1 C3.1 ; C5.1 U5.1 ; C7.1 1690,-1030 U7.1 ; U2.1 2035,-1400 C2.1 ; U4.1 C4.1 ; C6.1 U6.1 ; C8.1 3265,-1030 U8.1
LAYER1: P6.8 pad.13@4335,-2020 R69.2 U9.5 | length 1992.9
  Top Layer w10: U9.5 pad.13@4335,-2020
  Bottom Layer w10: P6.8 3390,-2645 3595,-2850 4015,-2850 4270,-2595 4270,-2085 4335,-2020 R69.2
LAYER2: P6.7 pad.13@4335,-2315 R75.2 U11.5 | length 1690.6
  Top Layer w10: U11.5 pad.13@4335,-2315
  Bottom Layer w10: P6.7 3455,-2745 3580,-2870 4025,-2870 4335,-2560 4335,-2315 R75.2
LAYER3: P6.6 pad.13@4335,-1430 pad.17 R81.2 U13.5 | length 2620.4
  Top Layer w10: pad.17@3410,-2485 pad.17@3410,-2335 ; U13.5 pad.13@4335,-1430
  Bottom Layer w10: P6.6 3054,-2561 3130,-2485 pad.17@3410,-2485 ; pad.17@3410,-2335 3435,-2335 3560,-2210 3560,-1380 3665,-1275 3930,-1275 4085,-1430 4335,-1430 R81.2
LAYER4: P6.5 pad.13@4335,-1725 R87.2 U15.5 | length 2460.3
  Top Layer w10: U15.5 pad.13@4335,-1725
  Bottom Layer w10: P6.5 3129,-2820 3435,-2820 3505,-2890 4035,-2890 4390,-2535 4390,-1780 4335,-1725 R87.2
LAYER5: P6.4 pad.13@3877,-2020 R70.2 U10.5 | length 1534.4
  Top Layer w10: U10.5 pad.13@3877,-2020
  Bottom Layer w10: P6.4 2954,-2496 3035,-2415 3465,-2415 3620,-2260 3620,-2015 3660,-1975 3785,-1975 3830,-2020 3877,-2020 R70.2
LAYER6: P6.3 pad.13@3877,-2315 R76.2 U12.5 | length 1828.4
  Top Layer w10: U12.5 pad.13@3877,-2315
  Bottom Layer w10: P6.3 3005,-2694 3005,-2485 3055,-2435 3475,-2435 3640,-2270 3640,-2030 3665,-2005 3750,-2005 3830,-2085 3830,-2295 3850,-2315 3877,-2315 R76.2
LAYER7: P6.2 pad.13@3877,-1430 R82.2 U14.5 | length 2196.1
  Top Layer w10: U14.5 pad.13@3877,-1430
  Bottom Layer w10: P6.2 2854,-2481 2960,-2375 3445,-2375 3580,-2240 3580,-1440 3615,-1405 3815,-1405 3840,-1430 3877,-1430 R82.2
LAYER8: P6.1 pad.13@3877,-1725 R88.2 U16.5 | length 2003.5
  Top Layer w10: U16.5 pad.13@3877,-1725
  Bottom Layer w10: P6.1 2905,-2694 2905,-2470 2980,-2395 3455,-2395 3600,-2250 3600,-1715 3625,-1690 3785,-1690 3820,-1725 3877,-1725 R88.2
NetC10_2: C10.2 R65.1 U9.6 | length 168.1
  Top Layer w10: 4247.5,-2115 4247.5,-2007.5 4272,-1983 U9.6
NetC12_2: C12.2 R66.1 U10.6 | length 168.1
  Top Layer w10: 3789.5,-2115 3789.5,-2007.5 3814,-1983 U10.6
NetC14_2: C14.2 R71.1 U11.6 | length 168.1
  Top Layer w10: 4247.5,-2410 4247.5,-2302.5 4272,-2278 U11.6
NetC16_2: C16.2 R72.1 U12.6 | length 168.1
  Top Layer w10: 3789.5,-2410 3789.5,-2302.5 3814,-2278 U12.6
NetC18_2: C18.2 R77.1 U13.6 | length 168.1
  Top Layer w10: 4247.5,-1525 4247.5,-1417.5 4272,-1393 U13.6
NetC20_2: C20.2 R78.1 U14.6 | length 168.1
  Top Layer w10: 3789.5,-1525 3789.5,-1417.5 3814,-1393 U14.6
NetC22_2: C22.2 R83.1 U15.6 | length 168.1
  Top Layer w10: 4247.5,-1820 4247.5,-1712.5 4272,-1688 U15.6
NetC24_2: C24.2 R84.1 U16.6 | length 168.1
  Top Layer w10: 3789.5,-1820 3789.5,-1712.5 3814,-1688 U16.6
NetC25_1: C25.1 C26.1 D1.2 R89.2 U17.8 | length 476.4
  Top Layer w15: R89.2 D1.2@4003.98,-312.56
  Top Layer w30: C25.1@4020,-750 4020,-485
  Bottom Layer w15: C26.1@4020,-847.44 C25.1@4020,-750
NetC27_1: C27.1 U17.7 | length 196.3
  Top Layer w15: U17.7 3754.61,-549.61 3777.44,-572.44 C27.1
NetC27_2: C27.2 L1.1 U17.6 | length 215.1
  Top Layer w15: L1.1@3659.94,-627.56 C27.2
NetC30_1: C30.1 R93.2 U17.3 | length 418.1
  Top Layer w15: C30.1 3510,-195 3530,-175 3680,-175 3705.39,-200.39 U17.3
NetD1_1: D1.1 P8.2 | length 351.4
  Top Layer w50: D1.1 4066.42,-141.42 P8.2
NetD2_2: D2.2 R94.2 | length 97.4
  Bottom Layer w15: R94.2@4375,-897.44 D2.2
NetR1_1: R1.1 U1.19 | length 96.8
  Bottom Layer w30: U1.19 R1.1
NetR2_1: R2.1 U2.19 | length 96.8
  Bottom Layer w30: U2.19 R2.1
NetR3_1: R3.1 U3.19 | length 96.8
  Bottom Layer w30: U3.19@725,-264 R3.1@821.85,-264
NetR4_1: R4.1 U4.19 | length 96.8
  Bottom Layer w30: U4.19 R4.1
NetR5_1: R5.1 U1.18 | length 96.8
  Bottom Layer w30: U1.18 R5.1
NetR6_1: R6.1 U2.18 | length 96.8
  Bottom Layer w30: U2.18 R6.1
NetR7_1: R7.1 U3.18 | length 96.8
  Bottom Layer w30: U3.18@725,-364 R7.1@821.85,-364
NetR8_1: R8.1 U4.18 | length 96.8
  Bottom Layer w30: U4.18 R8.1
NetR9_1: R9.1 U1.17 | length 96.8
  Bottom Layer w30: U1.17 R9.1
NetR10_1: R10.1 U2.17 | length 96.8
  Bottom Layer w30: U2.17 R10.1
NetR11_1: R11.1 U3.17 | length 96.8
  Bottom Layer w30: U3.17@725,-464 R11.1@821.85,-464
NetR12_1: R12.1 U4.17 | length 96.8
  Bottom Layer w30: U4.17 R12.1
NetR13_1: R13.1 U1.16 | length 96.8
  Bottom Layer w30: U1.16 R13.1
NetR14_1: R14.1 U2.16 | length 96.8
  Bottom Layer w30: U2.16 R14.1
NetR15_1: R15.1 U3.16 | length 96.8
  Bottom Layer w30: U3.16@725,-564 R15.1@821.85,-564
NetR16_1: R16.1 U4.16 | length 96.8
  Bottom Layer w30: U4.16 R16.1
NetR17_1: R17.1 U1.15 | length 96.8
  Bottom Layer w30: U1.15 R17.1
NetR18_1: R18.1 U2.15 | length 96.8
  Bottom Layer w30: U2.15 R18.1
NetR19_1: R19.1 U3.15 | length 96.8
  Bottom Layer w30: U3.15@725,-664 R19.1@821.85,-664
NetR20_1: R20.1 U4.15 | length 96.8
  Bottom Layer w30: U4.15 R20.1
NetR21_1: R21.1 U1.14 | length 96.8
  Bottom Layer w30: U1.14 R21.1
NetR22_1: R22.1 U2.14 | length 96.8
  Bottom Layer w30: U2.14 R22.1
NetR23_1: R23.1 U3.14 | length 96.8
  Bottom Layer w30: U3.14@725,-764 R23.1@821.85,-764
NetR24_1: R24.1 U4.14 | length 96.8
  Bottom Layer w30: U4.14 R24.1
NetR25_1: R25.1 U1.13 | length 96.8
  Bottom Layer w30: U1.13 R25.1
NetR26_1: R26.1 U2.13 | length 96.8
  Bottom Layer w30: U2.13 R26.1
NetR27_1: R27.1 U3.13 | length 96.8
  Bottom Layer w30: U3.13@725,-864 R27.1@821.85,-864
NetR28_1: R28.1 U4.13 | length 96.8
  Bottom Layer w30: U4.13 R28.1
NetR29_1: R29.1 U1.12 | length 96.8
  Bottom Layer w30: U1.12 R29.1
NetR30_1: R30.1 U2.12 | length 96.8
  Bottom Layer w30: U2.12 R30.1
NetR31_1: R31.1 U3.12 | length 96.8
  Bottom Layer w30: U3.12@725,-964 R31.1@821.85,-964
NetR32_1: R32.1 U4.12 | length 96.8
  Bottom Layer w30: U4.12 R32.1
NetR33_1: R33.1 U5.19 | length 96.8
  Bottom Layer w30: R33.1 U5.19
NetR34_1: R34.1 U6.19 | length 96.8
  Bottom Layer w30: R34.1 U6.19
NetR35_1: R35.1 U7.19 | length 96.8
  Bottom Layer w30: R35.1@1328.15,-964 U7.19@1425,-964
NetR36_1: R36.1 U8.19 | length 96.8
  Bottom Layer w30: R36.1 U8.19
NetR37_1: R37.1 U5.18 | length 96.8
  Bottom Layer w30: R37.1 U5.18
NetR38_1: R38.1 U6.18 | length 96.8
  Bottom Layer w30: R38.1 U6.18
NetR39_1: R39.1 U7.18 | length 96.8
  Bottom Layer w30: R39.1@1328.15,-864 U7.18@1425,-864
NetR40_1: R40.1 U8.18 | length 96.8
  Bottom Layer w30: R40.1 U8.18
NetR41_1: R41.1 U5.17 | length 96.8
  Bottom Layer w30: R41.1 U5.17
NetR42_1: R42.1 U6.17 | length 96.8
  Bottom Layer w30: R42.1 U6.17
NetR43_1: R43.1 U7.17 | length 96.8
  Bottom Layer w30: R43.1@1328.15,-764 U7.17@1425,-764
NetR44_1: R44.1 U8.17 | length 96.8
  Bottom Layer w30: R44.1 U8.17
NetR45_1: R45.1 U5.16 | length 96.8
  Bottom Layer w30: R45.1 U5.16
NetR46_1: R46.1 U6.16 | length 96.8
  Bottom Layer w30: R46.1 U6.16
NetR47_1: R47.1 U7.16 | length 96.8
  Bottom Layer w30: R47.1@1328.15,-664 U7.16@1425,-664
NetR48_1: R48.1 U8.16 | length 96.8
  Bottom Layer w30: R48.1 U8.16
NetR49_1: R49.1 U5.15 | length 96.8
  Bottom Layer w30: R49.1 U5.15
NetR50_1: R50.1 U6.15 | length 96.8
  Bottom Layer w30: R50.1 U6.15
NetR51_1: R51.1 U7.15 | length 96.8
  Bottom Layer w30: R51.1@1328.15,-564 U7.15@1425,-564
NetR52_1: R52.1 U8.15 | length 96.8
  Bottom Layer w30: R52.1 U8.15
NetR53_1: R53.1 U5.14 | length 96.8
  Bottom Layer w30: R53.1 U5.14
NetR54_1: R54.1 U6.14 | length 96.8
  Bottom Layer w30: R54.1 U6.14
NetR55_1: R55.1 U7.14 | length 96.8
  Bottom Layer w30: R55.1@1328.15,-464 U7.14@1425,-464
NetR56_1: R56.1 U8.14 | length 96.8
  Bottom Layer w30: R56.1 U8.14
NetR57_1: R57.1 U5.13 | length 96.8
  Bottom Layer w30: R57.1 U5.13
NetR58_1: R58.1 U6.13 | length 96.8
  Bottom Layer w30: R58.1 U6.13
NetR59_1: R59.1 U7.13 | length 96.8
  Bottom Layer w30: R59.1@1328.15,-364 U7.13@1425,-364
NetR60_1: R60.1 U8.13 | length 96.8
  Bottom Layer w30: R60.1 U8.13
NetR61_1: R61.1 U5.12 | length 96.8
  Bottom Layer w30: R61.1 U5.12
NetR62_1: R62.1 U6.12 | length 96.8
  Bottom Layer w30: R62.1 U6.12
NetR63_1: R63.1 U7.12 | length 96.8
  Bottom Layer w30: R63.1@1328.15,-264 U7.12@1425,-264
NetR64_1: R64.1 U8.12 | length 96.8
  Bottom Layer w30: R64.1 U8.12
NetR67_1: R67.1 U9.1 | length 106.7
  Top Layer w10: U9.1 4237,-1983 4272.44,-1947.56 R67.1
NetR68_1: R68.1 U10.1 | length 106.7
  Top Layer w10: U10.1 3779,-1983 3814.44,-1947.56 R68.1
NetR73_1: R73.1 U11.1 | length 106.7
  Top Layer w10: U11.1 4237,-2278 4272.44,-2242.56 R73.1
NetR74_1: R74.1 U12.1 | length 106.7
  Top Layer w10: U12.1 3779,-2278 3814.44,-2242.56 R74.1
NetR79_1: R79.1 U13.1 | length 106.7
  Top Layer w10: U13.1 4237,-1393 4272.44,-1357.56 R79.1
NetR80_1: R80.1 U14.1 | length 106.7
  Top Layer w10: U14.1 3779,-1393 3814.44,-1357.56 R80.1
NetR85_1: R85.1 U15.1 | length 106.7
  Top Layer w10: U15.1 4237,-1688 4272.44,-1652.56 R85.1
NetR86_1: R86.1 U16.1 | length 106.7
  Top Layer w10: U16.1 3779,-1688 3814.44,-1652.56 R86.1
NetR89_1: R89.1 U17.1 | length 85.6
  Top Layer w15: U17.1@3804.45,-257.44 R89.1
NetR90_1: R90.1 R91.2 | length 67
  Top Layer w15: R90.1 R91.2
NetR91_1: R91.1 R92.2 U17.2 | length 215.5
  Top Layer w15: U17.2 R91.1@3754.61,-107.05 ; R91.1@3756.65,-105 R92.2
NetR93_1: R93.1 U17.4 | length 96.2
  Top Layer w15: R93.1 3594.25,-256.81 U17.4
ROWH1: C9.1 C10.1 P7.1 pad.4@4148,-2057 U9.2 U9.3 | length 792.9
  Top Layer w10: 4167.44,-2020 C9.1
  Bottom Layer w35: P7.1 4025,-2650 4090,-2585 4090,-2115 pad.4@4148,-2057
ROWH2: C13.1 C14.1 P7.2 pad.4@4148,-2352 U11.2 U11.3 | length 610
  Top Layer w10: 4167.44,-2315 C13.1
  Bottom Layer w35: P7.2@3970.5,-2749.5 4045.5,-2749.5 4148,-2647 pad.4@4148,-2352
ROWH3: C17.1 C18.1 P7.3 pad.4@4148,-1467 U13.2 U13.3 | length 1425
  Top Layer w10: 4167.44,-1430 C17.1
  Top Layer w35: P7.3 3871,-2604 3920,-2555 3975,-2555 4030,-2500 4030,-1640 4148,-1522 pad.4@4148,-1467
ROWH4: C21.1 C22.1 P7.4 pad.4@4148,-1762 U15.2 U15.3 | length 1391.6
  Top Layer w10: 4167.44,-1725 C21.1
  Top Layer w35: P7.4 3936,-2815 4045,-2815 4090,-2770 4090,-1860 4148,-1802 pad.4@4148,-1762
ROWH5: C11.1 C12.1 P7.5 pad.4@3690,-2057 U10.2 U10.3 | length 721.6
  Top Layer w10: 3709.44,-2020 C11.1
  Bottom Layer w35: pad.4@3690,-2057 3771,-2138 P7.5
ROWH6: C15.1 C16.1 P7.6 pad.4@3690,-2352 U12.2 U12.3 | length 778.1
  Top Layer w10: 3709.44,-2315 C15.1
  Bottom Layer w35: pad.4@3690,-2352 3690,-2425 3590,-2525 3590,-2765 3640,-2815 3706,-2815 P7.6
ROWH7: C19.1 C20.1 P7.7 pad.4@3690,-1467 pad.16@3950,-2475 U14.2 U14.3 | length 1681.9
  Top Layer w10: P7.7@3670,-2649 P7.7 ; 3709.44,-1430 C19.1
  Top Layer w35: P7.7@3670,-2649 3670,-2590 3785,-2475 pad.16@3950,-2475
  Bottom Layer w35: pad.4@3690,-1467 3832,-1467 3950,-1585 pad.16@3950,-2475
ROWH8: C23.1 C24.1 P7.8 pad.4@3690,-1762 U16.2 U16.3 | length 1158
  Top Layer w10: 3709.44,-1725 C23.1
  Top Layer w35: P7.8 3590,-2669 3590,-1915 3690,-1815 pad.4@3690,-1762
VCC: C1.2 C2.2 C3.2 C4.2 C5.2 C6.2 C7.2 C8.2 pad.3 pad.4@2865,-1365 pad.5 pad.6 pad.12 pad.13@1290,-165 pad.14 pad.15 R65.2 R66.2 R71.2 R72.2 R77.2 R78.2 R83.2 R84.2 U1.20 U2.20 U3.20 U4.20 U5.20 U6.20 U7.20 U8.20 U9.4 U10.4 U11.4 U12.4 U13.4 U14.4 U15.4 U16.4 W1.2 | length 11542.1
  Top Layer w10: R72.2 3869.56,-2372.56 ; R66.2 3869.56,-2077.56 ; R84.2 3869.56,-1782.56 ; R78.2 3869.56,-1487.56 ; R71.2 4327.56,-2372.56 ; R65.2 4327.56,-2077.56 ; R83.2 4327.56,-1782.56 ; R77.2 4327.56,-1487.56
  Top Layer w40: U1.20 pad.6 1290,-2225 1330,-2265 U5.20 ; U3.20 pad.13@1290,-165 ; U7.20 pad.5 pad.13@1290,-165 ; U2.20 2865,-1365 2865,-2225 2905,-2265 U6.20 ; U8.20 pad.3 pad.12 U4.20 2215,-80 1375,-80 pad.13@1290,-165
  Bottom Layer w15: C1.2 U1.20 ; C3.2 U3.20 ; U5.20 C5.2 ; U7.20 1460,-1030 C7.2 ; C2.2 2265,-1400 U2.20 ; C4.2 U4.20 ; U6.20 C6.2 ; U8.20 3035,-1030 C8.2
  Bottom Layer w40: pad.6 pad.5 ; pad.4@2865,-1365 pad.3 ; pad.12 2950,-80 3385,-80 3555,-250 3555,-615 3590,-650 pad.14
  Bottom Layer w50: pad.14 3840,-870 W1.2 4005,-975 4035,-1005 pad.15
VOUT: C28.1 C29.1 D2.1 L1.2 R90.2 W1.1 | length 1823.4
  Top Layer w15: R90.2 3520,-105 3455,-170 3455,-445 3525,-515 3525,-720 3590,-785 3645,-785 3680,-820 L1.2@3680,-1010
  Top Layer w20: C28.1@4110,-1055 C28.1@4170,-1050
  Top Layer w30: W1.1@3970,-1055 C28.1@4110,-1055
  Bottom Layer w15: C29.1 W1.1 ; C28.1@4170,-1055 4170,-905 D2.1

## Polygon pours and split planes (outlines as drawn)
GND on Top Layer "Top Layer" (solid, remove dead copper, pour order 12): 4475,-2925 4475,0 0,0 0,-2925
GND on Bottom Layer "Bottom Layer" (solid, remove dead copper, pour order 14): 4475,0 4475,-2925 0,-2925 0,0

## Keep-outs
Keep-Out Layer:
  the board outline again, w10

## Other copper
Top Layer:
  region net NetC27_2: 3725,-700 3725,-435 3685,-435 3685,-700
  region net NetC25_1: 4065,-530 4065,-265 3955,-265 3955,-530
  region net NetC25_1: 4065,-530 4065,-435 3785,-435 3785,-530
  region net ROWH3: 4185,-1490 4125,-1490 4125,-1545 4185,-1545
  region net ROWH3: 4225,-1420 4125,-1420 4125,-1490 4225,-1490
  region net NetC18_2: 4260,-1510 4235,-1510 4235,-1540 4260,-1540
  region net VCC: 4375,-1450 4275,-1450 4275,-1490 4375,-1490
  region net VCC: 4375,-2335 4275,-2335 4275,-2375 4375,-2375
  region net NetC14_2: 4260,-2395 4235,-2395 4235,-2425 4260,-2425
  region net ROWH2: 4225,-2305 4125,-2305 4125,-2375 4225,-2375
  region net ROWH2: 4185,-2375 4125,-2375 4125,-2430 4185,-2430
  region net NetC10_2: 4260,-2100 4235,-2100 4235,-2130 4260,-2130
  region net VCC: 4425,-2375 4425,-1195 4370,-1195 4370,-2375
  region net VCC: 4375,-2040 4275,-2040 4275,-2080 4375,-2080
  region net ROWH1: 4225,-2010 4125,-2010 4125,-2080 4225,-2080
  region net ROWH1: 4185,-2080 4125,-2080 4125,-2135 4185,-2135
  region net ROWH4: 4185,-1785 4125,-1785 4125,-1840 4185,-1840
  region net ROWH4: 4225,-1715 4125,-1715 4125,-1785 4225,-1785
  region net VCC: 4375,-1745 4275,-1745 4275,-1785 4375,-1785
  region net NetC22_2: 4260,-1805 4235,-1805 4235,-1835 4260,-1835
  region net VCC: 3917,-1745 3817,-1745 3817,-1785 3917,-1785
  region net VCC: 3917,-2040 3817,-2040 3817,-2080 3917,-2080
  region net VCC: 3970,-2375 3970,-1195 3912,-1195 3912,-2375
  region net ROWH6: 3727,-2375 3665,-2375 3665,-2430 3727,-2430
  region net ROWH6: 3767,-2305 3665,-2305 3665,-2375 3767,-2375
  region net NetC16_2: 3802,-2395 3777,-2395 3777,-2425 3802,-2425
  region net VCC: 3917,-2335 3817,-2335 3817,-2375 3917,-2375
  region net VCC: 3917,-1450 3817,-1450 3817,-1490 3917,-1490
  region net NetC12_2: 3802,-2100 3777,-2100 3777,-2130 3802,-2130
  region net ROWH5: 3767,-2010 3665,-2010 3665,-2080 3767,-2080
  region net ROWH5: 3727,-2080 3665,-2080 3665,-2135 3727,-2135
  region net ROWH8: 3727,-1785 3665,-1785 3665,-1840 3727,-1840
  region net ROWH8: 3767,-1715 3665,-1715 3665,-1785 3767,-1785
  region net NetC24_2: 3802,-1805 3777,-1805 3777,-1835 3802,-1835
  region net ROWH7: 3727,-1490 3665,-1490 3665,-1545 3727,-1545
  region net ROWH7: 3767,-1420 3665,-1420 3665,-1490 3767,-1490
  region net NetC20_2: 3802,-1510 3777,-1510 3777,-1540 3802,-1540
  region net VCC: 4370,-1260 4370,-1195 3965,-1195 3965,-1260
  rectangle net VOUT: 3575,-1110 3980,-1040
  rectangle net GND: 4220,-555 4330,-445
  rectangle net GND: 3255,-1105.83 3343.87,-1020
  rectangle net GND: 3260,-205 3340,-120
  rectangle net GND: 3260,-1405 3340,-1325
  rectangle net GND: 3260,-2305 3340,-2225
  rectangle net GND: 1960,-1110 2040,-1025
  rectangle net GND: 1960,-205 2040,-125
  rectangle net GND: 1960,-1405 2040,-1325
  rectangle net GND: 1960,-2305 2040,-2225
  rectangle net GND: 1685,-2305 1765,-2225
  rectangle net GND: 385,-2305 465,-2225
  rectangle net GND: 385,-1110 465,-1025
  rectangle net GND: 385,-205 465,-125
  rectangle net GND: 1685,-210 1764.69,-125
  rectangle net GND: 385,-1405 465,-1325
  rectangle net GND: 3655,-420 3810,-320
  rectangle net VCC: 3960,-1315 4090,-1230
  rectangle net GND: 3745,-1897.28 3790,-1855
  rectangle net GND: 4200,-1897.28 4239.4,-1855
  rectangle net GND: 4200,-2192.28 4245,-2150
  rectangle net GND: 4070,-1695 4110,-1655
  rectangle net GND: 4200,-1307.28 4246.15,-1275
  rectangle net GND: 3795,-1245 3845,-1195
  rectangle net GND: 4080,-830 4265,-680
  rectangle net GND: 4240,-1115 4410,-1000
Bottom Layer:
  rectangle net GND: 4220,-555 4330,-445
  rectangle net GND: 3260,-1105 3334.71,-1025
  rectangle net GND: 3260,-205 3340,-120
  rectangle net GND: 3260,-1407.2 3334.71,-1320
  rectangle net GND: 3260,-2305 3340,-2225
  rectangle net GND: 1960,-205 2040,-125
  rectangle net GND: 1965.29,-1105 2040,-1024.65
  rectangle net GND: 1965.29,-1405 2040,-1325
  rectangle net GND: 1960,-2305 2040,-2225
  rectangle net GND: 1685,-2305 1765,-2225
  rectangle net GND: 390.29,-1405 465,-1324.65
  rectangle net GND: 390.29,-1105 465,-1025.31
  rectangle net GND: 385,-205 465,-125
  rectangle net GND: 1685,-205 1765,-125
  rectangle net GND: 3685,-415 3775,-325
  rectangle net GND: 4195,-2195 4245,-2145
  rectangle net GND: 4195,-1900 4245,-1850
  rectangle net GND: 4065,-1700 4115,-1650
  rectangle net GND: 4200,-1320 4255,-1265
  rectangle net GND: 3795,-1245 3845,-1195
  rectangle net GND: 1685,-1105 1759.71,-1025
  rectangle net GND: 4085,-800 4180,-700
  rectangle net GND: 4230,-1115 4325,-995

## Silkscreen, mask and mechanical layers (free items; w line width, h text height)
Top Overlay:
  text "5" at 825,-125 h80
  text "6" at 1300,-125 h80
  text "7" at 2400,-125 h80
  text "8" at 2875,-125 h80
  text "LPPROJECTS" at 80,-305 h100 r270
  text "Luka Penger" at 165,-305 h100 r270
  text "1" at 825,-1325 h80
  text "2" at 1300,-1325 h80
  text "3" at 2400,-1325 h80
  text "4" at 2875,-1325 h80
  text "LED CUBE 8x8x8 BOARD" at 100,-1525 h100 r270
  text "LAYERS" at 2860,-2485 h80
  text "INPUTS" at 530,-2490 h80
  text "CLOCKS" at 915,-2490 h80
  text "VER 4.0.0" at 2145,-2840 h100
Bottom Overlay:
  text "12V" at 4420,-365 h80 r90

## Text inside footprints (layer, text, board x,y; h text height)
C25: Top Overlay "+" at 4025,-835 h60 r90
C28: Top Overlay "+" at 4175,-1140 h60 r90